# Altium PCB Temperature_Measurement_Device.PcbDoc
Units mil, origin at the board's own origin, x right, y up, seen from the top; angles counter-clockwise.
Board outline 2925 x 3625 mil, 2 copper layers (Top Layer, Bottom Layer); 64 components, 53 nets, 251 pads, 76 vias.
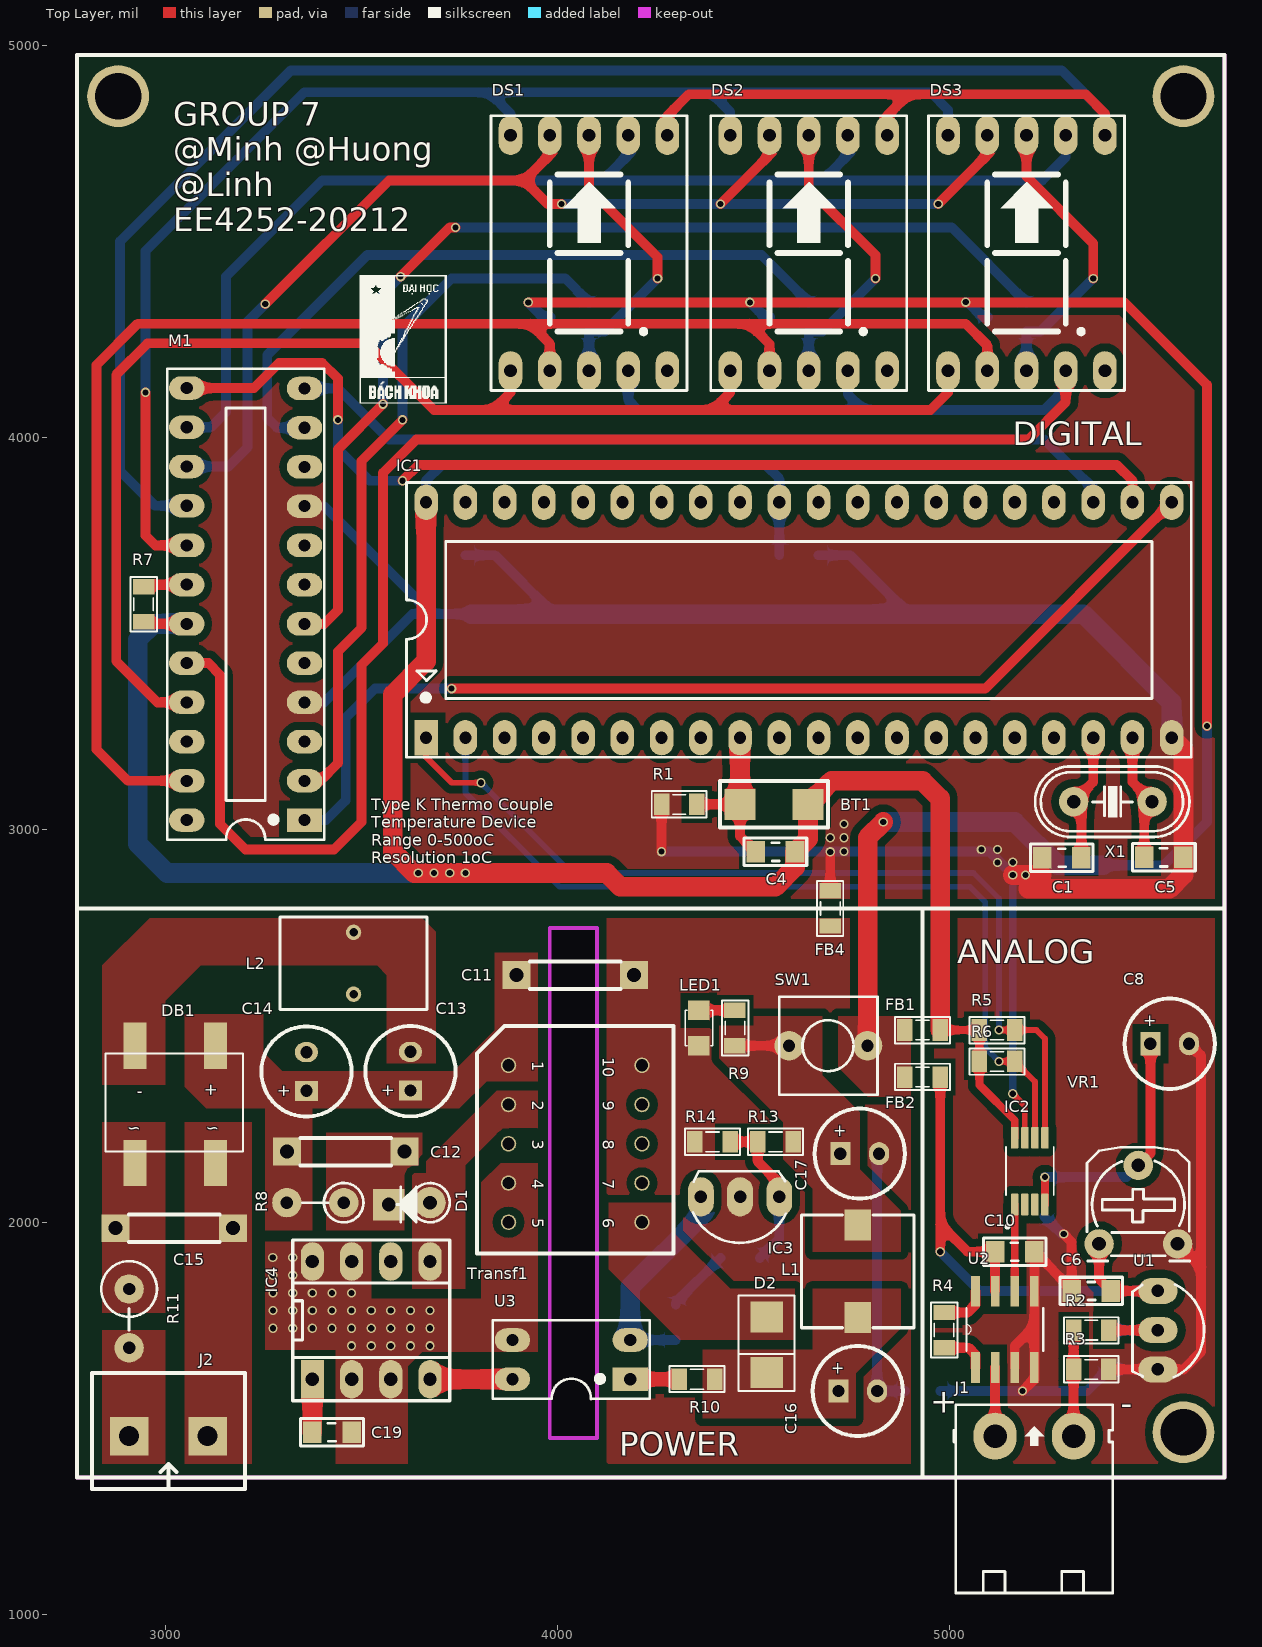
[diagram p0: Top Layer view]
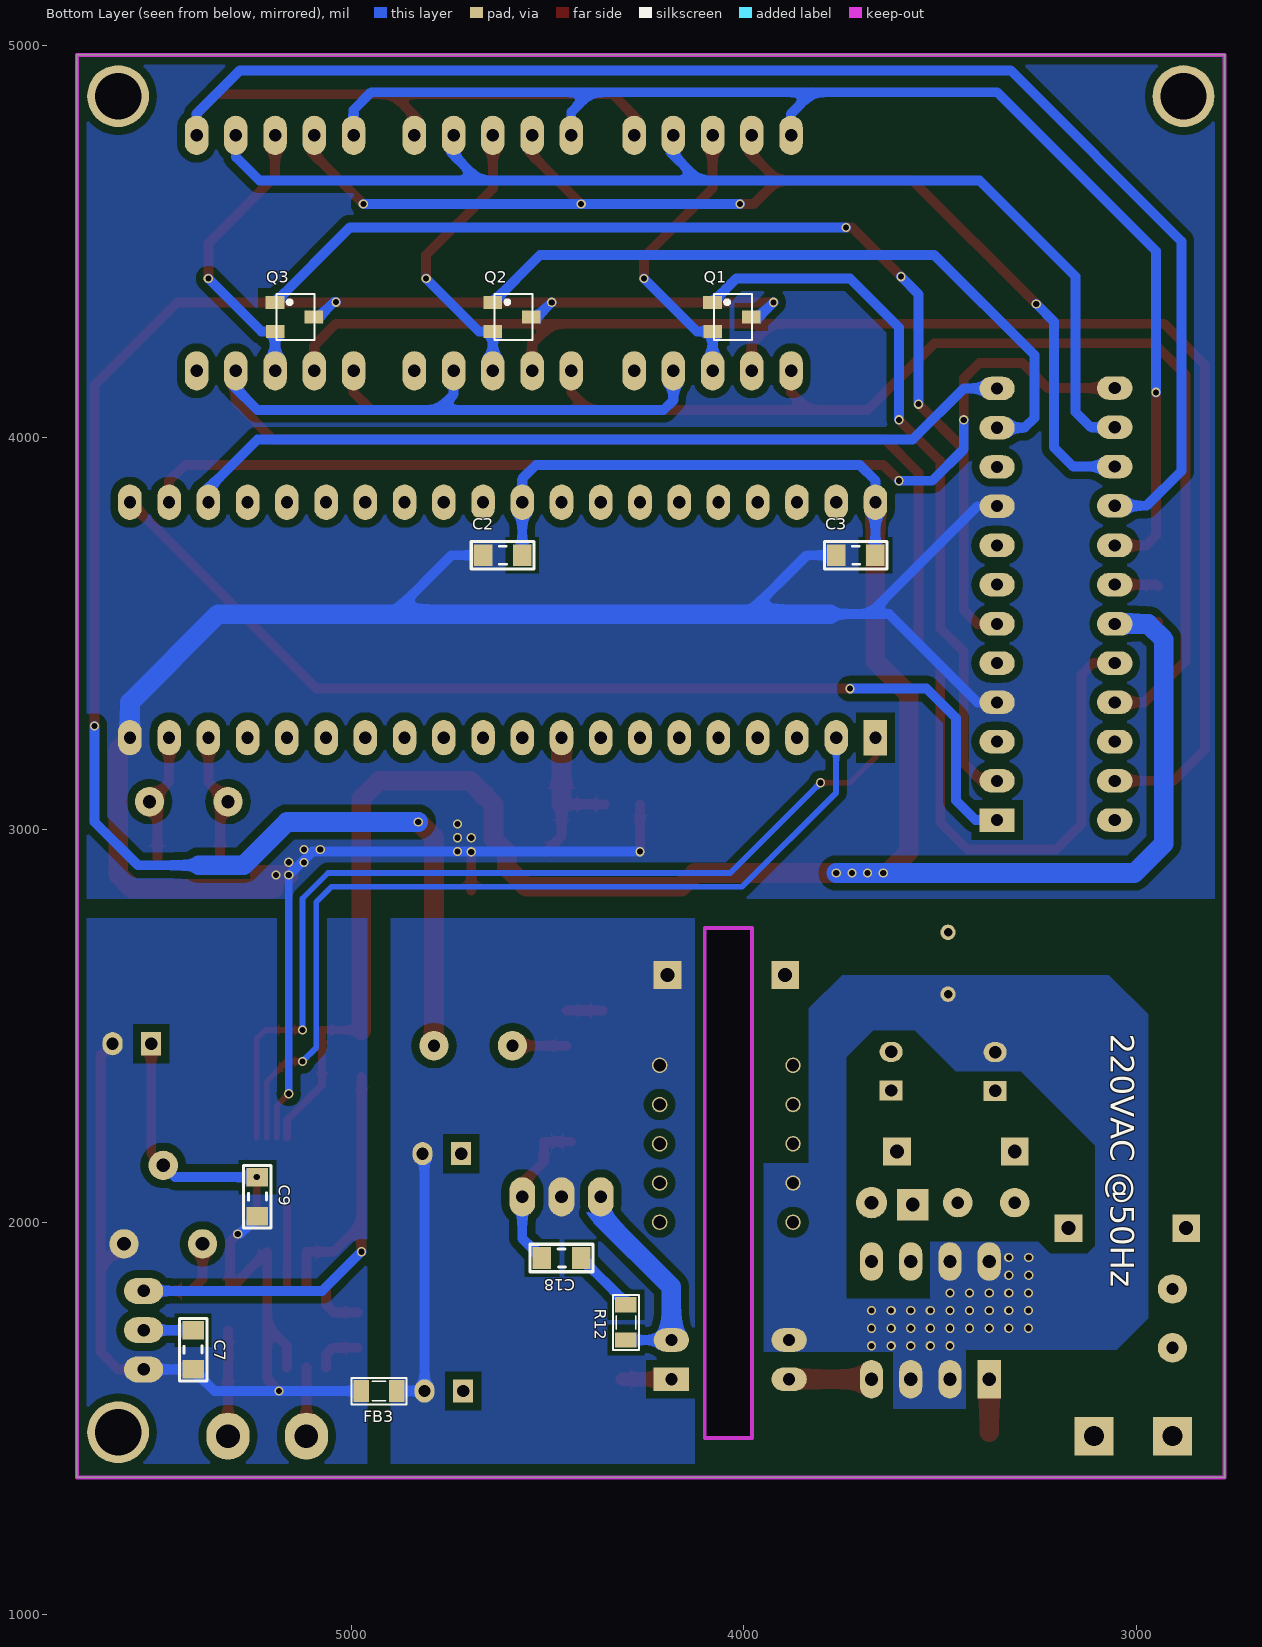
[diagram p1: Bottom Layer view, seen from below]
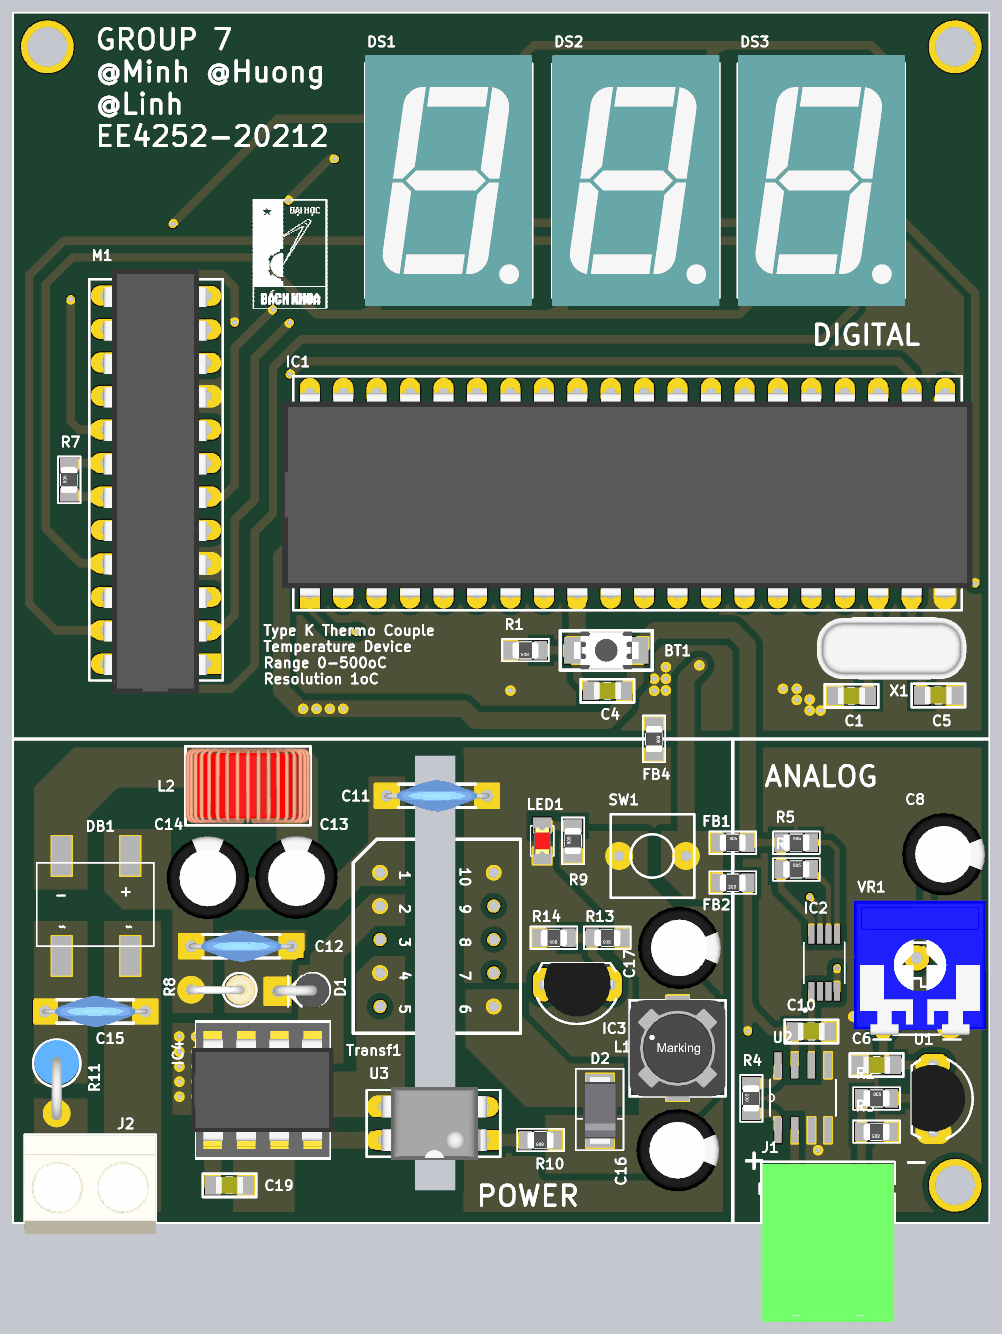
[diagram p2: 3D render of the assembled board from above, using the file's embedded part models]
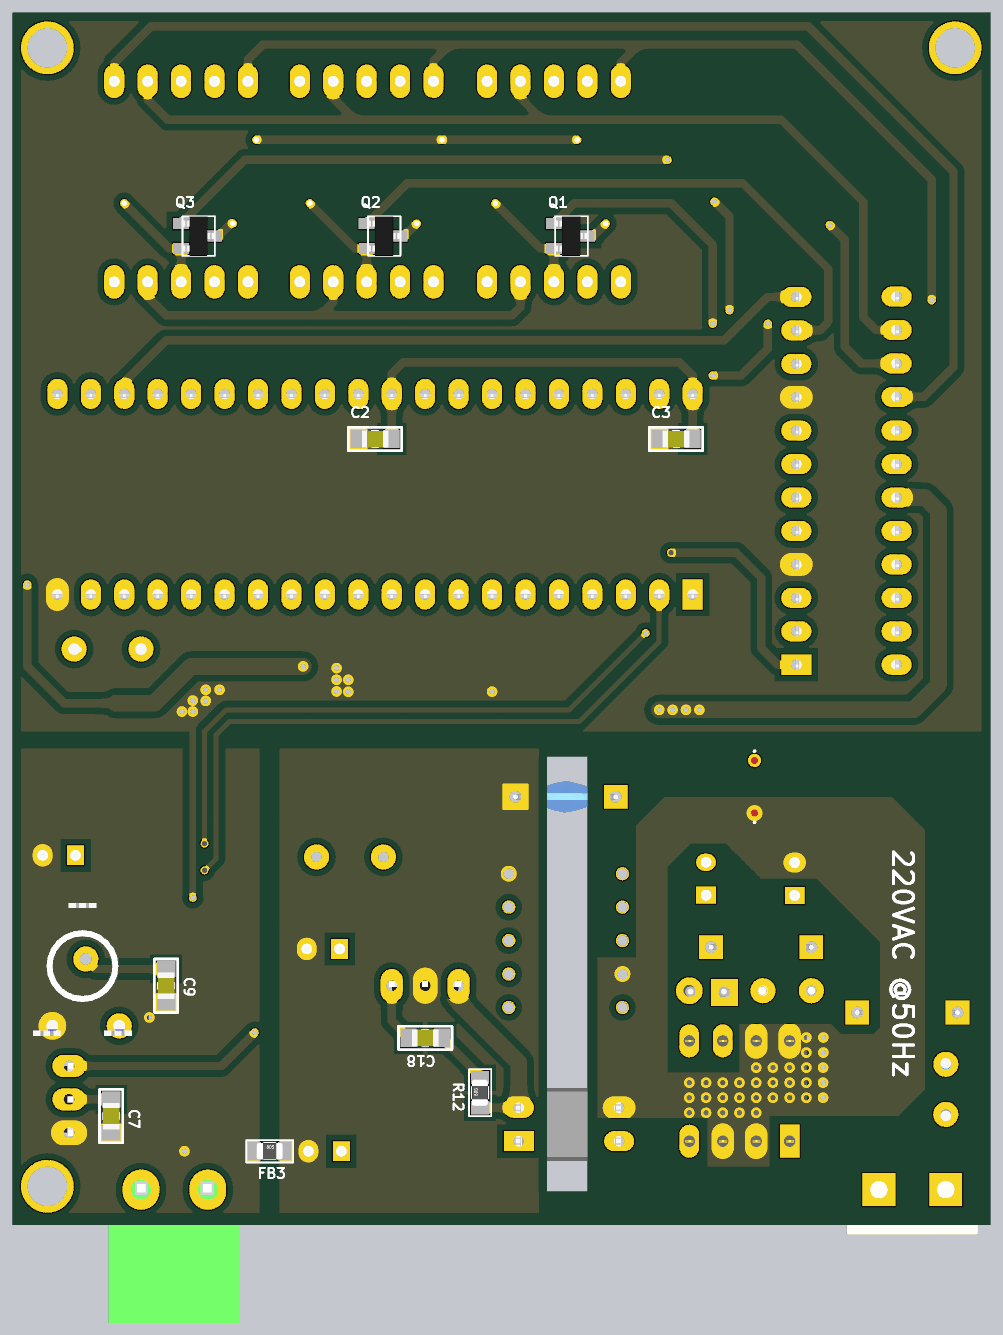
[diagram p3: 3D render of the assembled board from below, using the file's embedded part models]

## Layer stack, top to bottom
Top Solder: solder mask 0.4, Solder Resist, Dk 3.5
Top Layer: signal copper 1.4
Dielectric 1: dielectric 12.6, FR-4, Dk 4.8
Bottom Layer: signal copper 1.4
Bottom Solder: solder mask 0.4, Solder Resist, Dk 3.5

## Board outline
2775,1350 2775,4975 5700,4975 5700,1350
cut-out: 3980,1450 4100,1450 4100,2750 3980,2750

## Design rules (kind name [scope] priority, off if disabled: settings)
Clearance [All] p1: gap=20 ignorepadtopadclearanceinfootprint=TRUE except(0: Arc-Text Arc-Hole Track-Text Track-Hole SMDPad-Text SMDPad-Hole THPad-Text THPad-Hole Via-Text Via-Hole Fill-Text Fill-Hole Poly-Text Poly-Hole Region-Text Region-Hole Text-Text Text-Hole; 6: Arc-Arc Arc-Track Arc-SMDPad Track-Track Track-SMDPad; 10: Arc-Via Track-Via SMDPad-Via THPad-Via Via-Via; 15: Arc-THPad Track-THPad SMDPad-SMDPad SMDPad-THPad THPad-THPad)
PolygonConnect [All] p1: connectstyle=Direct reliefconductorwidth=10 reliefentries=4 polygonreliefangle="90 Angle" airgapwidth=10
RoutingVias [All] p1: holewidth=15.75 width=23.62 viastyle="Through Hole" minholewidth=15.75 minwidth=23.62 maxholewidth=19.68 maxwidth=27.56
SolderMaskExpansion [All] p1: expansion=4
Width [All] p1: maxlimit=50 minlimit=15 preferedwidth=25
30 further rules are at their usual default settings.

## Classes and differential pairs
component class 4: C11 C12 C13 C14 C15 C16 C17 C18 C19 D1 D2 DB1 FB1 FB2 FB3 FB4 IC3 IC4 J2 L1 L2 LED1 R8 R10 R11 R12 R13 R14 SW1 Transf1 U3
component class 3: C6 C7 C8 C9 C10 IC2 J1 R2 R3 R4 R5 R6 U1 U2 VR1
component class 2: BT1 C1 C2 C3 C4 C5 IC1 R1 X1
component class 1: DS1 DS2 DS3 M1 Q1 Q2 Q3 R7

## Components (designator, comment, footprint, x,y, rotation, side; value= is the part's Value field where it differs from the comment)
BT1 "SW2" "SW 3x2x4" 4551.61,3065 r0 top
C1 "33pF" CAP_0805 5285,2930 r0 top
C2 "100nF" CAP_0805 4615,3701 r180 bottom value=33p
C3 "100nF" CAP_0805 3715,3701 r180 bottom value=33p
C4 "100nF" CAP_0805 4555,2945 r0 top
C5 "33pF" CAP_0805 5545,2929 r180 top
C6 "100nF" CAP_0805 5360,1826 r0 top value=33p
C7 "100nF" CAP_0805 5405,1675 r90 bottom value=33p
C8 "10uF" C8mm 5560,2455 r0 top
C9 "100nF" CAP_0805 5241,2065 r90 bottom value=33p
C10 "100nF" CAP_0805 5165,1924 r180 top value=33p
C11 "1nF/400v" 103/2KV 4195,2630 r180 top
C12 "1nF/400V" 103/2KV 3310,2180 r0 top
C13 "6.8uF/400V" C8mm 3625,2385 r90 top
C14 "6.8uF/400V" C8mm 3360,2384.21 r90 top
C15 "20D471K" 103/2KV 3173,1985 r180 top
C16 "1000uF/16V" C8mm 4765,1570 r0 top
C17 "470uF/16V" C8mm 4770,2175 r0 top
C18 "100nF" CAP_0805 4465,1910 r180 bottom value=33p
C19 "100nF" CAP_0805 3425,1464 r180 top value=33p
D1 "1N4937" DIO-1AN 3620,2045 r0 top value=1N5007
D2 "SS14" DO-214AC(SMA) 4530,1710 r90 top value=1N5007
DB1 "Diode Bridge" DB207S 3028,2300 r0 top
DS1 "7SEG S" 7SEGS 3880,4170 r0 top value="LED 7S SEG"
DS2 "7SEG S" 7SEGS 4440,4170 r0 top value="LED 7S SEG"
DS3 "7SEG S" 7SEGS 4995,4170 r0 top value="LED 7S SEG"
FB1 "10R" RES-SMD-0805 4930,2370 r180 top
FB2 "10R" RES-SMD-0805 4930,2490 r0 top
FB3 "10R" RES-SMD-0805 4930,1570 r180 bottom
FB4 "10R" RES-SMD-0805 4695,2800 r270 top
IC1 "AT89C52" DIP40/W0.6 3665,3235 r0 top
IC2 "ADC IC 10bits" "SOP - 8 µMAX" 5203.39,2130.24 r90 top
IC3 "TL431" qto-92 4465,2065 r180 top
IC4 "TNY264" DIP8 3523.01,1750 r90 top
J1 "KF2" KF2-5.08T 5115,1455 r0 top
J2 "AC-IN" KF2-5.08 3008,1455 r180 top
L1 "2.2uF" L-SMD-M-7.3x4.5 4765,1875 r180 top value="150 mH"
L2 "100uH" L-DIP-M-9.5x6 3480,2660 r270 top value="150 mH"
LED1 "LED" LED-0805-Red 4360,2540 r270 top value="LED 3 ly Single Colour"
M1 "MAX7219ENG" DIP24/W0.3 3355,3025 r90 top
Q1 "2SC1815" SOT23D 4031,4307 r270 bottom value=C1815
Q2 "2SC1815" SOT23D 4591,4307 r270 bottom value=C1815
Q3 "2SC1815" SOT23D 5146,4307 r270 bottom value=C1815
R1 "10k" RES-SMD-0805 4310,3065 r180 top
R2 "24k9" RES-SMD-0805 5360,1725 r0 top
R3 "102R" RES-SMD-0805 5360,1625 r180 top
R4 "510R" RES-SMD-0805 4985,1725 r90 top
R5 "10k" RES-SMD-0805 5120,2490 r0 top
R6 "10k" RES-SMD-0805 5120,2410 r0 top
R7 "10k" RES-SMD-0805 2945,3575 r90 top
R8 "200k" RES-1/4WD 3390,2050 r180 top
R9 "10k" RES-SMD-0805 4451.95,2495 r90 top
R10 "200R" RES-SMD-0805 4355,1600 r180 top
R11 "2R/2W" RES-1WD 2908,1765 r270 top
R12 "3.3k" RES-SMD-0805 4301,1745 r90 bottom
R13 "10k" RES-SMD-0805 4555,2205 r180 top
R14 "10k" RES-SMD-0805 4395,2205 r180 top
SW1 "SW" SW2 4590,2450 r0 top value="SW chip 2 pin"
Transf1 "Transformer EE12.7" "Transformer EE12.7" 4045,2200 r270 top
U1 "LM35" QTO-92 5530,1725 r270 top
U2 "INA128P" SOP-8 5140,1727 r90 top
U3 "PC817" DIP4/W0.3 4185,1600 r90 top
VR1 "10k" VR 5380,1945 r0 top value="VR 10K"
X1 "12Mhz" XT2 5415,3071.82 r0 top value=4Mhz

## Footprints (in the part's own frame and the unit in brackets; to place one, negate y for a bottom-side part, rotate by r counter-clockwise, add the part's x,y. Pads: shape width x height; smd on the part's side, far side on the other; paste and mask are expansions set on the pad)
7SEGS [mil] "DIP 10 Leads; Body 12 x 15 mm; Pitch 0.5 mm"
  oval 60x100 hole 32: 1(0,0) 2(100,0) 3(200,0) 4(300,0) 5(400,0) 6(400,600) 7(300,600) 8(200,600) 9(100,600) 10(0,600)
  silkscreen extent -50,-50 450,650, body extent -50,-75 450,675, height 316
103/2KV [mm]
  rect 1.8x1.8 hole 0.9: 1(0,0) 2(7.62,0)
  silkscreen extent 0.89,-0.89 6.73,0.89, body extent -0.19,-1.2 7.81,1.19, height 9.03
C8mm [mm]
  rect 1.3x1.5 hole 0.8: 1(-1.25,0)
  oval 1.3x1.5 hole 0.8: 2(1.25,0)
  silkscreen extent -2.92,-2.92 2.92,2.92, body extent -3.15,-3.15 3.16,3.15, height 11.51
CAP_0805 [mm]
  rect 1.2x1.4 smd: 1(-1.27,-0.025) 2(1.27,-0.025)
  silkscreen extent -2.03,-0.91 2.03,0.86, body extent -1.01,-0.66 1.01,0.61, height 0.61
DB207S [mm] "Bridge Rectifiers 2A 1000V"
  rect 1.5x3 smd: 1(2.54,3.81) 2(2.54,-3.785) 3(-2.667,-3.785) 4(-2.667,3.81)
  silkscreen extent -4.57,-3.05 4.32,3.3
DIO-1AN [mil] "Diode 1A, W 100mil, L 150mil"
  round 80 hole 35: 1(55,5)
  rect 80x80 hole 35: 2(-50,0)
  silkscreen extent -30,-45 105,55, body extent -64,-50 104,55, height 252
DIP4/W0.3 [mil] "4 PIN, W 300mil, Pin to pin 100mil"
  rect 60x90 hole 31: 1(0,0)
  oval 60x90 hole 31: 2(100,0) 3(100,300) 4(0,300)
  silkscreen extent -50,-50 150,350, body extent -59,-10 159,305, height 170
DIP8 [mm]
  rect 2.5x1.5 hole 0.864: 1(-3.81,3.759)
  oval 2.5x1.5 hole 0.864: 2(-3.81,1.219) 3(-3.81,-1.321) 4(-3.81,-3.861) 5(3.81,-3.861) 6(3.81,-1.321) 7(3.81,1.219) 8(3.81,3.759)
  silkscreen extent -5.21,-5.13 5.21,5.03, body extent -5.08,-5.4 5.08,5.4, height 8.1
DIP24/W0.3 [mil] "DIP24/W.300, Pin to pin 100mil"
  rect 60x90 hole 31: 1(0,0)
  oval 60x90 hole 31: 2(100,0) 3(200,0) 4(300,0) 5(400,0) 6(500,0) 7(600,0) 8(700,0) 9(800,0) 10(900,0) 11(1000,0) 12(1100,0) 13(1101,300) 14(1001,300) 15(901,300) 16(801,300) 17(700,300) 18(600,300) 19(500,300) 20(400,300) 21(300,300) 22(200,300) 23(100,300) 24(0,300)
  silkscreen extent -50,-50 1150,350, body extent -89,-3 1181,307, height 200
DIP40/W0.6 [mil] "40 PIN, W 600mil, Pin to pin 100mil"
  rect 60x90 hole 31: 1(0,0)
  oval 60x90 hole 31: 2(100,0) 3(200,0) 4(300,0) 5(400,0) 6(500,0) 7(600,0) 8(700,0) 9(800,0) 10(900,0) 11(1000,0) 12(1100,0) 13(1200,0) 14(1300,0) 15(1400,0) 16(1500,0) 17(1600,0) 18(1700,0) 19(1800,0) 20(1900,0) 21(1900,600) 22(1800,600) 23(1700,600) 24(1600,600) 25(1500,600) 26(1400,600) 27(1300,600) 28(1200,600) 29(1100,600) 30(1000,600) 31(900,600) 32(800,600) 33(700,600) 34(600,600) 35(500,600) 36(400,600) 37(300,600) 38(200,600) 39(100,600) 40(0,600)
  silkscreen extent -50,-50 1950,650, body extent -82,-10 1982,600, height 224
DO-214AC(SMA) [mm] "DO-214AC Diode Smallest Size"
  rect 2x2.1 smd: 1(1.245,-0.076) 2(-2.367,-0.076)
  silkscreen extent -3.56,-1.86 2.62,1.76, body extent -3.13,-1.38 2.07,1.22, height 2.4
KF2-5.08 [mm]
  rect 2.5x2.5 hole 1.3: 1(-2.54,0) 2(2.54,0)
  silkscreen extent -4.95,-4.08 4.95,3.43, body extent -5,-4.07 5,3.43, height 10
KF2-5.08T [mil] "Header 2, 2 pin, hight 300mil, Pin to Pin 200, Colour Green"
  oval 110x120 hole 60: 1(0,0) 2(200,0)
  silkscreen extent -105,-400 300,80, body extent -97,-399 297,73, height 334
L-DIP-M-9.5x6 [mm] "Body 9.5x6mm, 2 leads"
  round 1 hole 0.55: 1(-2,0) 2(2,0)
  silkscreen extent -3,-4.75 3,4.75, body extent -2.85,-4.75 2.85,4.75, height 9.75
L-SMD-M-7.3x4.5 [mm] "WE-PDA SMD Shielded Power Inductor, 7345"
  rect 1.7x2 smd: 1(0,3) 2(0,-3)
  silkscreen extent -3.65,-3.65 3.65,3.65, body extent -3.65,-3.65 3.65,3.65, height 4.05
LED-0805-Red [mil]
  rect 50x55 smd: 1(0,0) 2(90,0)
  silkscreen extent 0,-35 90,35, body extent 5,-25 85,25, height 43
qto-92 [mil] "TO-92"
  oval 66x100 hole 32: 1(-100,0) 2(0,0) 3(100,0)
  silkscreen extent -117,-65 120,118, body extent -109,-66 109,95, height 245
QTO-92 [mil] "TO-92"
  oval 66x100 hole 32: 1(-100,0) 2(0,0) 3(100,0)
  silkscreen extent -117,-65 120,118, body extent -109,-66 109,95, height 245
RES-1/4WD [mil]
  round 75 hole 31.5: 1(-65,0) 2(80,0)
  silkscreen extent -115,-50 40,50, body extent -112,-45 92,46, height 379
RES-1WD [mil]
  round 75 hole 31.5: 1(-65,0) 2(85,0)
  silkscreen extent -136,-71 40,71, body extent -135,-67 105,67, height 498
RES-SMD-0805 [mil]
  rect 39.37x55 smd: 1(-45,0) 2(45,0)
  silkscreen extent -70,-34 70,33, body extent -39,-25 39,25, height 31
"SOP - 8 µMAX" [mm]
  rrect25% 1.42x0.47 smd: 1(-2.165,0.975) 2(-2.165,0.325) 3(-2.165,-0.325) 4(-2.165,-0.975) 5(2.165,-0.975) 6(2.165,-0.325) 7(2.165,0.325) 8(2.165,0.975)
  silkscreen extent -3.68,-1.55 1.55,1.55
SOP-8 [mil]
  rect 78x22 smd: 1(-97,75) 2(-97,25) 3(-97,-25) 4(-97,-75) 5(97,-75) 6(97,-25) 7(97,25) 8(97,75)
  silkscreen extent -54,-98 54,98
SOT23D [mm] "SOT 23C - 1-3-2 - BCE"
  rect 0.85x1.2 smd: 1(-0.95,-1.25) 2(0.94,-1.245) 3(0,1.25)
  silkscreen extent -1.5,-1.14 1.5,1.32, body extent -1.5,-1.17 1.5,1.33, height 1.06
SW2 [mil] "SW button 2pin, 250x 250 mil"
  round 75 hole 31: 1(0,0) 2(200,0)
  silkscreen extent -25,-125 225,125
"SW 3x2x4" [mm]
  rect 2x2 smd: 1(-2.2,0) 2(2.2,0)
  silkscreen extent -3.5,-1.5 3.5,1.5, body extent -2.45,-1.45 2.45,1.45, height 2
"Transformer EE12.7" [mm]
  round 1 hole 0.8: 1(-5.08,-4.318) 2(-2.54,-4.318) 3(0,-4.318) 4(2.54,-4.318) 5(5.08,-4.318) 6(5.08,4.318) 7(2.54,4.318) 8(0,4.318) 9(-2.54,4.318) 10(-5.08,4.318)
  silkscreen extent -7.62,-6.35 7.11,6.35
VR [mil] "Resistor Variable"
  round 75 hole 35: 1(0,0) 2(100,200) 3(200,0)
  silkscreen extent -31,-44 231,246, body extent -87,-30 307,372, height 165
XT2 [mil] "Footpin for Crystal 2 pin"
  round 75 hole 34: 1(-100,0) 2(100,0)
  silkscreen extent -198,-90 195,90, body extent -233,-93 213,90, height 138

## Part data
BT1: library part "Nut Nhan 2 Chan SMD", "SMD", Chung_Loai=Dán, Don_Vi=Con, Ma_Hang=MH001036, Ten_Linh_Kien="Nút Nh?n 2 Chân 3x6x2.5MM SMD"
C1 C4 C5: library part CapCeramic, "Capacitor", LatestRevisionDate=17-Jul-2002, LatestRevisionNote="Re-released for DXP Platform.", PackageReference=RAD-0.3, Published=8-Jun-2000, Publisher="Altium Limited"
C2 C3 C6 C7 C9 C10 C18 C19: library part CapSMD, "Capacitor", LatestRevisionDate=17-Jul-2002, LatestRevisionNote="Re-released for DXP Platform.", PackageReference=RAD-0.3, Published=8-Jun-2000, Publisher="Altium Limited"
C8 C13 C14 C16 C17: library part "Cap Pol", "Polarized Capacitor (Axial)", LatestRevisionDate=17-Jul-2002, LatestRevisionNote="Re-released for DXP Platform.", PackageReference=POLAR0.8, Published=8-Jun-2000, Publisher="Altium Limited"
C11 C12: library part Cap2KV, "CAP CERAMIC", LatestRevisionDate=17-Jul-2002, LatestRevisionNote="Re-released for DXP Platform.", PackageReference=RAD-0.3, Published=8-Jun-2000, Publisher="Altium Limited"
C15: library part Cap2KV, "Varistor", LatestRevisionDate=17-Jul-2002, LatestRevisionNote="Re-released for DXP Platform.", PackageReference=RAD-0.3, Published=8-Jun-2000, Publisher="Altium Limited"
D1: library part "Diode SMD", "Diode Schottky / 1N4937", Code - JEDEC=DO-214-AB, Published=8-Jun-2000, Publisher="Altium Limited", Revision="July-2002: Re-released for DXP Platform."
D2: library part "Diode SMD", "Diode Schottky / 1N5819", Code - JEDEC=DO-214-AB, Published=8-Jun-2000, Publisher="Altium Limited", Revision="July-2002: Re-released for DXP Platform."
DB1: library part "Diode Bridge Flate"
DS1 DS2 DS3: library part LED7S, "Single 7 Seg Dipslay"
FB1 FB2 FB3 FB4: library part "Resistor - SMD", "Ferrit Bead", Manufacturer="Generic Components", Class=Passive, Published=08/06/2000, Publisher="Altium Hobart Technology Centre"
IC1: "Atmel AT89C52, 8k Byte Flash Memory , 40 Pin"
IC2: library part MAX11646
IC3: "Programmable Shunt Regulator"
IC4: "Enhanced, Energy Efficient, Low Power Off-line Switcher"
J1: "Couple Thermo type K", Manufacturer="Würth Elektronik eiSos GmbH", partNo=691103110002, ComponentLink1 Description=Manufacturer, ComponentLink1URL=http://www.we-online.com, ComponentLink2 Description=Datasheet, ComponentLink2URL=http://katalog.we-online.de/em/datasheet/6911031100xx.pdf, Created by="Karrer Zheng", Created Date="29 October 2013", NoPins=2
J2: library part KF2, Manufacturer="Würth Elektronik eiSos GmbH", partNo=691103110002, ComponentLink1 Description=Manufacturer, ComponentLink1URL=http://www.we-online.com, ComponentLink2 Description=Datasheet, ComponentLink2URL=http://katalog.we-online.de/em/datasheet/6911031100xx.pdf, Created by="Karrer Zheng", Created Date="29 October 2013", NoPins=2
L1 L2: library part L-DIP-1, "Inductor"
LED1: "LED Single colour Green and Red"
M1: "Serially Interfaced, 8-Digit LED Display Driver", Code_JEDEC=MS-001-AF, ComponentLink1Description="Manufacturer Link", ComponentLink1URL=http://www.maxim-ic.com/, ComponentLink2Description=Datasheet, ComponentLink2URL=http://pdfserv.maxim-ic.com/en/ds/MAX7219-MAX7221.pdf, DatasheetVersion=Jul-1997, LatestRevisionDate=29-May-2009, LatestRevisionNote="Component Body Added.", PackageDescription="DIP, 24-Pin, Row Spacing 7.62 mm, Pitch 2.54 mm", PackageReference=NG24A, PackageVersion=1997, Published=16-Jan-2001, Publisher="Altium Limited"
Q1 Q2 Q3: "NPN 600mW, ECB", =C2383
R1 R2 R3 R4 R5 R6 R7 R8 R9 R10 R11 R12 R13 R14: library part "Resistor - SMD", "Resistor", Manufacturer="Generic Components", Class=Passive, Published=08/06/2000, Publisher="Altium Hobart Technology Centre"
SW1: library part SW2, "Switch button 2 pin"
Transf1: library part "Tranformer EE16"
U1: "Teminal"
U2: library part INA129PA, "Instrumental Operate Amplifier"
U3: "Single Opto"
VR1: library part VR, "Var Resistor"
X1: library part XT2, "Crystal For all Crystal 2pin."

## Free pads (board coordinates)
  round 157.48 hole 118.11: 0(2880,4870) 0(5595,1465) 0(5595,4870)

## Via types
v1: diameter 23.62, hole 15.75, Top Layer to Bottom Layer, 76 vias

## Nets (pads, with @x,y where several pads share a name; then routed paths per layer and width w, separated by ;. In a path a pad name is that pad's centre, name@x,y a point inside that pad or via, vN(x,y) a via of type N, cw(c..) or ccw(c..) an arc to the next point about the centre after c; other vN are vias at no path point)
5V: FB1.2 FB2.1 Q1.3 Q2.3 Q3.3 SW1.2 | length 4646.1
  Top Layer w25: v1(3925,4344.4) v1(4490,4344.4) 5444.81,4344.4 5655,4134.21 v1(5655,3265)
  Top Layer w50: SW1.2 4790,2980 v1(4830,3020)
  Bottom Layer w25: v1(3925,4344.4) 3962.4,4307 Q1.3 ; v1(4490,4344.4) 4490.6,4344.4 4528,4307 Q2.3 ; v1(5040,4345) 5045,4345 5083,4307 Q3.3 ; 5390,2910 5545,2910 5655,3020 v1(5655,3265)
  Bottom Layer w50: v1(4830,3020) 5164.63,3020 5274.63,2910 5390,2910
5VA: C6.2 C10.2 FB1.1 U1.1 U2.7 VR1.1 | length 1563.8
  Top Layer w25: v1(4975,1925) 4975,1995 ; FB1.1 4975,1995 ; U2.7 C10.2 5045,1925 4975,1995 ; VR1.1 5380,1855 C6.2 U1.1
  Bottom Layer w25: v1(4975,1925) 5075,1825 U1.1
5VD: BT1.2 C2.2 C3.2 C4.2 FB2.2 IC1.31 IC1.40 IC2.8 M1.19 R5.1 R6.1 R7.1 | length 6520.1
  Top Layer w20: FB2.2 R5.1 R6.1 5075,2350 5165,2260 IC2.8
  Top Layer w25: R7.1 2950,3525 M1.19
  Top Layer w50: IC1.40 3665,3430 3580,3345 3580,2944.57 3634.57,2890 v1(3645,2890) v1(3685,2890) v1(3725,2890) v1(3765,2890) 4125,2890 4160,2855 4555,2855 4605,2905 C4.2 4638.23,2977.23 BT1.2 4698.23,3125 4930,3125 4975,3080 FB2.2
  Bottom Layer w25: C3.2 IC1.40 3665,3890 3705,3930 4530,3930 4565,3895 IC1.31 C2.2
  Bottom Layer w50: M1.19 2970,3525 2930,3485 2930,2965 3005,2890 v1(3645,2890) v1(3685,2890) v1(3725,2890) v1(3765,2890)
ADC2: IC2.1 U2.6 | length 221
  Top Layer w20: U2.6 IC2.1
D0: M1.2 Q1.1 | length 1834.1
  Top Layer w25: M1.2 3395,3125 3440,3170 3440,3455 3500,3515 3500,3940 v1(3605,4045)
  Bottom Layer w25: v1(3605,4045) 3605,4280 3730,4405 4019.61,4405 Q1.1
D1: M1.11 Q2.1 | length 1801.1
  Bottom Layer w25: M1.11 3285,4025 3260,4050 3260,4210 3515,4465 4519.61,4465 Q2.1
D2: M1.6 Q3.1 | length 2741.7
  Top Layer w25: M1.6 3405,3525 3440,3560 3440,3970 v1(3555,4085) ; v1(3600,4410) 3725,4535 v1(3740,4535)
  Bottom Layer w25: v1(3555,4085) 3555,4365 v1(3600,4410) ; v1(3740,4535) 5004.61,4535 Q3.1
GND: C11.1 C16.2 C17.2 FB3.2 FB4.2 IC3.2 LED1.2 R14.2 Transf1.10 | length 677.9
  Bottom Layer w25: C17.2 4814.21,2170 C16.2 FB3.2
GND_IN: C14.2 C19.1 IC4.2 IC4.3 IC4.7 IC4.8 L2.2 Transf1.4 U3.3
  other v1: 3475,1685 3525,1685 3575,1685 3625,1685 3675,1685 3275,1730 3325,1730 3375,1730 3425,1730 3475,1730 3525,1730 3575,1730 3625,1730 3675,1730 3275,1775 3325,1775 3375,1775 3425,1775 3475,1775 3525,1775 3575,1775 3625,1775 3675,1775 3275,1820 3325,1820 3375,1820 3425,1820 3475,1820 3274.21,1865 3325,1865 3274.21,1910 3325,1910
GNDA: C6.1 C7.1 C8.2 C9.1 C10.1 FB3.1 R3.1 U1.3 U2.3 U2.4 U2.5 VR1.3 | length 2563.4
  Top Layer w25: U2.3 5165,1685 5215,1735 ; v1(5185,1570) 5215,1600 U2.4 5215,1735 ; v1(5290,1970) 5310,1950 C6.1@5310,1830 ; C6.1 C6.1@5310,1830 ; R3.1 U1.3 5595,1625 5640,1670 5640,1885 ; VR1.3 5640,1885 ; C8.2 5640,2424.21 5640,1885 ; 5215,1735 U2.5 C10.1 C6.1@5310,1830
  Bottom Layer w25: FB3.1 v1(5185,1570) 5349,1570 C7.1 U1.3 ; C9.1 5285,1970 v1(5290,1970)
GNDD: C1.1 C2.1 C3.1 C5.1 FB4.1 IC1.20 IC2.7 M1.4 M1.9 R1.2 | length 6221.5
  Top Layer w15: v1(5160,2327.5) 5190.59,2296.91 IC2.7
  Top Layer w25: v1(4265,2944.57) R1.2 ; FB4.1 v1(4695,2944)
  Top Layer w50: v1(5160,2885) v1(5192.44,2885) 5234,2885 5199,2850 5559,2850 5595,2886 C5.1 5595,3205 IC1.20
  Bottom Layer w20: v1(5160,2327.5) v1(5160,2885)
  Bottom Layer w25: M1.4 3405,3325 3630,3550 3680,3550 ; M1.9 3405,3825 3680,3550 ; C3.1 3840,3700 3990,3550 ; 3780,3550 3680,3550 ; v1@4265.43,2945 v1(4730,2945) 5100,2945 v1(5160,2885) ; C2.1 4745,3700 4895,3550
  Bottom Layer w50: 3780,3550 3990,3550 4895,3550 5340,3550 5565,3325 IC1.20
  other v1: 5121.33,2916.79 5160,2917.74 5080,2950 5121.33,2950 4695,2980 4730,2980 4730,3015
LM35: J1.2 R2.1 R3.2 | length 270
  Top Layer w25: J1.2 R2.1
NetC7_2: C7.2 R2.2 U1.2 | length 251
  Top Layer w25: R2.2 U1.2
  Bottom Layer w25: C7.2 U1.2
NetC11_2: C11.2 C12.1 C13.1 C14.1 DB1.1 R8.2 Transf1.1
NetC12_2: C12.2 D1.2 R8.1
NetC13_2: C13.2 DB1.4 L2.1
NetC15_1: C15.1 DB1.2 J2.1
NetC15_2: C15.2 DB1.3 R11.1
NetC16_1: C16.1 D2.2 L1.1 R10.1
NetC17_1: C17.1 L1.2 R9.1 R13.1 SW1.1 | length 138.1
  Top Layer w25: R9.1 SW1.1
NetC18_1: C18.1 IC3.1 R13.2 R14.1 | length 409.5
  Top Layer w25: R14.1 R13.2 4510,2155 4565,2100 IC3.1
  Bottom Layer w25: C18.1 4565,1959 IC3.1
NetC18_2: C18.2 R12.2 | length 166.2
  Bottom Layer w25: R12.2 4301,1795 C18.2
NetC19_2: C19.2 IC4.1 | length 135
  Top Layer w50: C19.2 IC4.1
NetD1_1: D1.1 IC4.5 Transf1.2
NetD2_1: D2.1 Transf1.6
NetDS1_1: DS1.1 DS2.1 DS3.1 M1.21 | length 3488
  Top Layer w25: M1.21 2980,3325 2875,3430 2875,4160 2955,4240 3515,4240 3685,4070 3835,4070 ; DS1.1 3880,4115 3835,4070 ; DS2.1 4440,4115 4395,4070 ; DS3.1 4995,4115 4950,4070 4395,4070 ; 3835,4070 4395,4070
NetDS1_2: DS1.2 DS2.2 DS3.2 M1.23 | length 3926.7
  Top Layer w25: M1.23 2905,3125 2825,3205 2825,4185 2930,4290 3930,4290 ; DS1.2 3980,4240 3930,4290 ; DS2.2 4540,4238 4488,4290 ; DS3.2 5095,4235 5040,4290 4488,4290 ; 3930,4290 4488,4290
NetDS1_3: DS1.3 DS1.8 Q1.2 | length 768.4
  Top Layer w25: DS1.8 4080,4635 4255,4460 v1(4255,4405)
  Bottom Layer w25: DS1.3 Q1.2 4120,4270 v1(4255,4405)
NetDS1_4: DS1.4 DS2.4 DS3.4 M1.20 | length 5085.4
  Top Layer w25: M1.20 3110,3425 3140,3395 3140,3015 3205,2950 3430,2950 3500,3020 3500,3420 3555,3475 3555,3910 3640,3995 5200,3995 5295,4090 DS3.4
  Bottom Layer w25: DS1.4 4180,4095 4205,4070 4780,4070 ; DS2.4 4740,4110 4780,4070 ; DS3.4 5295,4125 5240,4070 4780,4070
NetDS1_6: DS1.6 DS2.6 DS3.6 M1.16 | length 4973.9
  Top Layer w25: DS1.6 4280,4820 4335,4875 4895,4875 ; DS2.6 4840,4820 4895,4875 ; DS3.6 5395,4825 5345,4875 4895,4875
  Bottom Layer w25: M1.16 2974,3826 2885,3915 2885,4500 3320,4935 5285,4935 5395,4825 DS3.6
NetDS1_7: DS1.7 DS2.7 DS3.7 M1.14 | length 3066.3
  Bottom Layer w25: M1.14 3116,4026 3155,4065 3155,4410 3400,4655 4115,4655 ; DS1.7 4180,4720 4115,4655 ; DS2.7 4740,4720 4675,4655 ; DS3.7 5295,4715 5235,4655 4675,4655 ; 4115,4655 4675,4655
NetDS1_9: DS1.9 DS2.9 DS3.9 M1.15 | length 3024.7
  Top Layer w25: v1(3255,4340) 3570,4655 3915,4655 ; DS1.9 3980,4720 3915,4655 ; v1(4010,4595) 3975,4595 3915,4655 ; v1(4415,4595) 4540,4720 DS2.9 ; v1(4970,4595) 5095,4720 DS3.9
  Bottom Layer w25: M1.15 3161,3926 3210,3975 3210,4295 v1(3255,4340) ; v1(4010,4595) v1(4415,4595) v1(4970,4595)
NetDS1_10: DS1.10 DS2.10 DS3.10 M1.17 | length 3400.2
  Top Layer w25: v1(2950,4115) 2950,3750 2975,3725 M1.17
  Bottom Layer w25: v1(2950,4115) 2950,4475 3355,4880 3825,4880 ; DS1.10 3880,4825 3825,4880 ; DS2.10 4440,4830 4390,4880 ; DS3.10 4995,4835 4950,4880 4390,4880 ; 3825,4880 4390,4880
NetDS2_3: DS2.3 DS2.8 Q2.2 | length 761.3
  Top Layer w25: DS2.8 4640,4635 4810,4465 v1(4810,4405)
  Bottom Layer w25: DS2.3 Q2.2 4675,4270 v1(4810,4405)
NetDS3_3: DS3.3 DS3.8 Q3.2 | length 761.3
  Top Layer w25: DS3.8 5195,4665 5365,4495 v1(5365,4405)
  Bottom Layer w25: DS3.3 Q3.2 5230,4270 v1(5365,4405)
NetIC1_1: IC1.1 IC2.5 R5.2 | length 2372.7
  Top Layer w15: IC1.1 3665,3185 3730,3120 v1(3805,3120) ; v1(5125,2490) R5.2 5220,2490 5241.77,2468.23 IC2.5
  Bottom Layer w15: v1(3805,3120) 4035,2890 5060,2890 5125,2825 v1(5125,2490)
NetIC1_2: IC1.2 IC2.6 R6.2 | length 2256.9
  Top Layer w15: v1(5125,2410) R6.2 5216.18,2358.82 IC2.6
  Bottom Layer w15: IC1.2 3765,3095 4005,2855 5051.13,2855 5090,2816.13 5090,2445 v1(5125,2410)
NetIC1_21: IC1.21 M1.1 | length 2668.5
  Top Layer w25: v1(3730,3360) 5090,3360 IC1.21
  Bottom Layer w25: M1.1 3410,3025 3460,3075 3460,3285 3535,3360 v1(3730,3360)
NetIC1_22: IC1.22 M1.13 | length 2754.4
  Top Layer w25: M1.13 3226,4126 3290,4190 3400,4190 3440,4150 v1(3440,4045) ; v1(3605,3890) 3645,3930 5425,3930 5465,3890 IC1.22
  Bottom Layer w25: v1(3440,4045) 3440,3970 3520,3890 v1(3605,3890)
NetIC1_23: IC1.23 M1.12 | length 2150.6
  Bottom Layer w25: M1.12 3440,4125 3570,3995 5240,3995 5365,3870 IC1.23
NetIC3_3: IC3.3 R12.1 U3.2 | length 555.6
  Bottom Layer w25: U3.2 R12.1
  Bottom Layer w50: U3.2 4185,1835 4365,2015 IC3.3
NetIC4_4: IC4.4 U3.4 | length 210
  Top Layer w50: IC4.4 U3.4
NetJ1_1: J1.1 U2.2 | length 175
  Top Layer w25: J1.1 U2.2
NetJ2_2: J2.2 R11.2
NetLED1_1: LED1.1 R9.2 | length 91.9
  Top Layer w25: LED1.1 R9.2
NetM1_18: M1.18 R7.2 | length 112.1
  Top Layer w25: R7.2 2950,3625 M1.18
NetR4_1: R4.1 U2.1 | length 119.7
  Top Layer w25: R4.1 5047.5,1680 5065,1662.5 U2.1
NetR4_2: R4.2 U2.8 | length 122.3
  Top Layer w25: R4.2 5045,1770 5065,1790 U2.8
NetR10_2: R10.2 U3.1 | length 125
  Top Layer w35: U3.1 R10.2
REF: C8.1 C9.2 IC2.4 VR1.2 | length 643.4
  Top Layer w20: IC2.4 v1(5241.77,2115)
  Top Layer w25: VR1.2 5510.79,2175.79 C8.1
  Bottom Layer w25: v1(5241.77,2115) 5450,2115 VR1.2
RESET: BT1.1 C4.1 IC1.9 R1.1 | length 417.6
  Top Layer w25: R1.1 BT1.1 4465,2984 C4.1
  Top Layer w50: BT1.1 IC1.9
XTAL1: C1.2 IC1.18 X1.1 | length 335
  Top Layer w25: C1.2 5335,3051.82 X1.1 5365,3121.82 IC1.18
XTAL2: C5.2 IC1.19 X1.2 | length 334
  Top Layer w25: IC1.19 5465,3121.82 X1.2 5495,3051.82 C5.2
pads on no net: DS1.5 DS2.5 DS3.5 IC1.3 IC1.4 IC1.5 IC1.6 IC1.7 IC1.8 IC1.10 IC1.11 IC1.12 IC1.13 IC1.14 IC1.15 IC1.16 IC1.17 IC1.24 IC1.25 IC1.26 IC1.27 IC1.28 IC1.29 IC1.30 IC1.32 IC1.33 IC1.34 IC1.35 IC1.36 IC1.37 IC1.38 IC1.39 IC2.2 IC2.3 IC4.6 M1.3 M1.5 M1.7 M1.8 M1.10 M1.22 M1.24 Transf1.3 Transf1.5 Transf1.7 Transf1.8 Transf1.9

## Polygon pours and split planes (outlines as drawn)
GNDD on Top Layer "GNDD_L01_P044" (solid, remove dead copper, pour order 44): 5675,2825 5675,4950 2800,4950 2800,2825
GNDA on Top Layer "GNDA_L01_P040" (solid, remove dead copper, pour order 40): 4960,1385 4960,2775 5675,2775 5675,1385
GND on Top Layer "GND_L01_P034" (solid, remove dead copper, pour order 34): 4125,1390 4125,2775 4900,2775 4900,1385 4125,1385
NetC17_1 on Top Layer "NETC17_1_L01_P030" (solid, remove dead copper, pour order 30): 4650,1925 4875,1925 4875,2030 4770,2135 4770,2280 4675,2375 4675,2525 4412.29,2525 4412.29,2417.71 4575,2255 4575,2160 4650,2085
5V on Top Layer "5V_L01_P032" (solid, remove dead copper, pour order 32): 4715,2525 4900,2525 4900,2320 4790,2320 4715,2395
GNDA on Top Layer "GNDA_L01_P038" (solid, pour order 38): 4960,1385
NetC16_1 on Top Layer "NETC16_1_L01_P028" (solid, pour order 28): 4370,1675 4370,1500 4760,1500 4760,1615 4875,1730 4875,1830 4650,1830 4650,1675
NetD2_1 on Top Layer "NETD2_1_L01_P026" (solid, pour order 26): 4130,2050 4300,2050 4300,1970 4440,1830 4605,1830 4605,1700 4310,1700 4130,1880
GND_IN on Top Layer "GND_IN_L01_P018" (solid, pour order 18): 3255,1950 3525,1950 3525,1805 3805,1805 3805,2101.4 3854.6,2151 3950,2151 3950,1670 3655,1670 3618.66,1633.66 3618.66,1385 3435,1385 3435,1675 3255,1675
no net on Top Layer "NONET_L01_P016" (solid, pour order 16): 3675,1460
NetC12_2 on Top Layer "NETC12_2_L01_P014" (solid, pour order 14): 3410,1980 3410,2228.3 3653.3,2228.3 3655,2230 3655,2137.5 3615,2137.5 3615,1980
NetD1_1 on Top Layer "NETD1_1_L01_P012" (solid, pour order 12): 3950,2335 3845,2335 3765,2255 3630,2120 3630,1830 3765,1830 3765,2145 3860,2240 3950,2240
NetC11_2 on Top Layer "NETC11_2_L01_P010" (solid, pour order 10): 3255,2295 3255,1980 3375,1980 3375,2295
NetC11_2 on Top Layer "NETC11_2_L01_P008" (solid, pour order 8): 3050,2530 3050,2345 3105,2290 3750,2290 3820,2360 3950,2360 3950,2687.2 3840,2687.2 3840,2490 3735,2385 3298.43,2385 3250,2433.43 3250,2530
NetC13_2 on Top Layer "NETC13_2_L01_P006" (solid, pour order 6): 2840,2350 2840,2655 2960,2775 3655,2775 3690,2740 3690,2405 3565,2405 3565,2630 3540,2655 3090,2655 3000,2565 3000,2350
NetC15_1 on Top Layer "NETC15_1_L01_P004" (solid, pour order 4): 3220,2255 3220,1385 3050,1385 3050,2255
NetC15_2 on Top Layer "NETC15_2_L01_P002" (solid, pour order 2): 2840,1770 2840,2255 3000,2255 3000,1770
NetJ2_2 on Top Layer "NETJ2_2_L01_P000" (solid, pour order 0): 2840,1385 2840,1725 3000,1725 3000,1385
GNDA on Bottom Layer "GNDA_L02_P042" (solid, remove dead copper, pour order 42): 5675,1385 4960,1385 4960,2775 5675,2775
GNDD on Bottom Layer "GNDD_L02_P046" (solid, remove dead copper, pour order 46): 5674.51,2825 5675,2825.49 5675,4950 2800,4950 2800,2825
GND on Bottom Layer "GND_L02_P036" (solid, remove dead copper, pour order 36): 4125,1385 4125,2775 4900,2775 4900,1385
GND_IN on Bottom Layer "GND_IN_L02_P024" (solid, pour order 24): 3950,2060 3740,2060 3740,2420 3670,2490 3550,2490 3550,2630 3750,2630 3834.97,2545.03 3834.97,2146.27
GND_IN on Bottom Layer "GND_IN_L02_P022" (solid, pour order 22): 3525,1950 3250,1950 3220,1920 3125,1920 3105,1940 3105,2195 3295,2385 3460,2385 3565,2490 3565,2630 3070,2630 2970,2530 2970,1755 3050,1675 3435,1675 3435,1525 3620,1525 3620,1670 3950,1670 3950,2150 3740,2150 3740,1805 3525,1805

## Keep-outs
Keep-Out Layer:
  lines w10: 2775,1350 2775,2800 2775,4875 2775,4975 5700,4975 5700,4850 5700,2800 5700,1350 5650,1350 4950,1350 2775,1350 ; 3980,1450 4100,1450 4100,2750 3980,2750 3980,1450

## Silkscreen, mask and mechanical layers (free items; w line width, h text height)
Top Overlay:
  drawing of 708 lines, arcs and shapes, not listed
  text "GROUP 7 / @Minh @Huong / @Linh / EE4252-20212" at 3020,4525 h60
  text "DIGITAL" at 5160,3980 h60
  text "Type K Thermo Couple / Temperature Device / Range 0-500oC / Resolution 1oC" at 3525,2915 h30
  text "ANALOG" at 5019,2660 h60
  text "+" at 4950,1515 h60
  text "-" at 5435,1510 h60
  text "POWER" at 4157.5,1405 h60
Bottom Overlay:
  text "220VAC @50Hz" at 3065,2480 h60 r90

## Text inside footprints (layer, text, board x,y; h text height)
C8: Top Overlay "+" at 5493,2499 h30
C13: Top Overlay "+" at 3581,2318 h30 r90
C14: Top Overlay "+" at 3316,2317.21 h30 r90
C16: Top Overlay "+" at 4698,1614 h30
C17: Top Overlay "+" at 4703,2219 h30
DB1: Top Overlay "~" at 2938,2225 h30; Top Overlay "~" at 3138,2225 h30; Top Overlay "-" at 2943,2320 h30; Top Overlay "+" at 3103,2320 h30 r270
Transf1: Top Overlay "10" at 4115,2420 h30 r270; Top Overlay "9" at 4115,2310 h30 r270; Top Overlay "8" at 4115,2210 h30 r270; Top Overlay "7" at 4115,2110 h30 r270; Top Overlay "6" at 4115,2010 h30 r270; Top Overlay "5" at 3935,2010.24 h30 r270; Top Overlay "4" at 3935,2110 h30 r270; Top Overlay "3" at 3935,2210 h30 r270; Top Overlay "2" at 3935,2310 h30 r270; Top Overlay "1" at 3935,2410 h30 r270